# Altium PCB WL1800-E-D001-PrinterC Rev.2.0.PcbDoc (part 2 of 2)
Units mil, origin at the board's own origin, x right, y up, seen from the top; angles counter-clockwise.
Board outline 5519 x 3937.77 mil, 2 copper layers (Top Layer, Bottom Layer); 232 components, 142 nets, 822 pads, 384 vias.
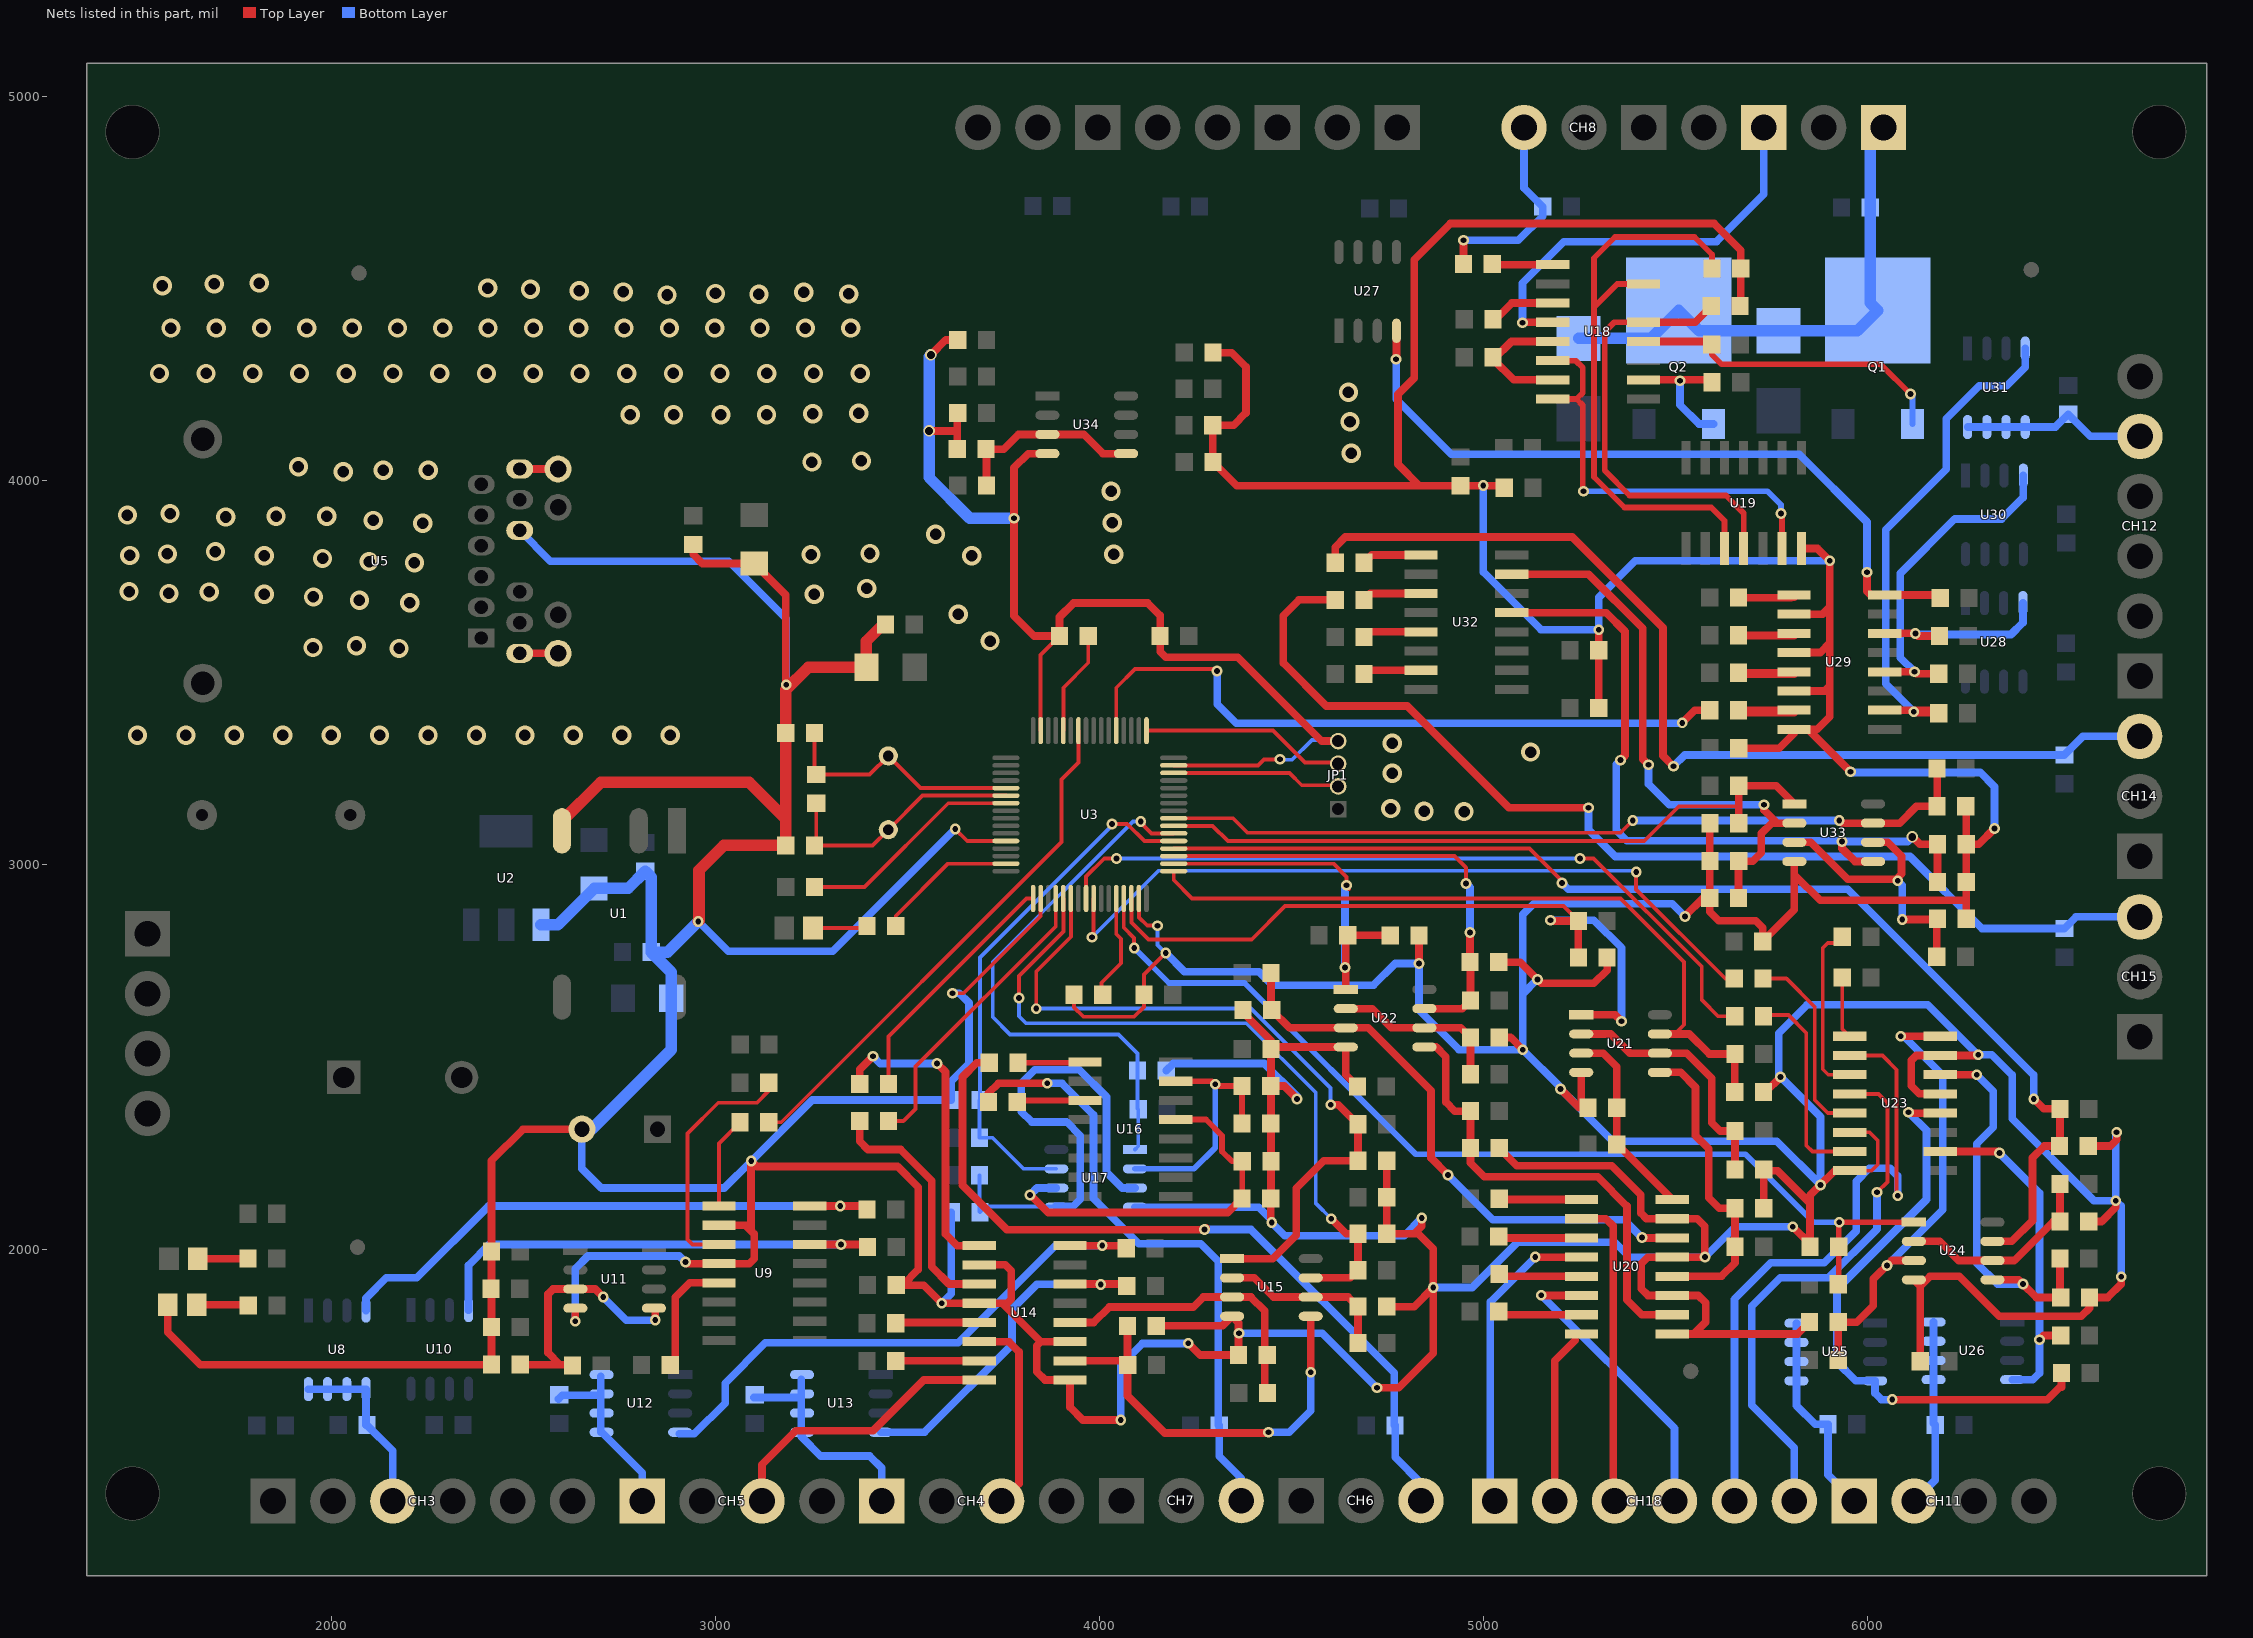
[diagram p2: the nets of this part, all layers, seen from the top]

## Via types
v1: diameter 28, hole 15, Top Layer to Bottom Layer, 192 vias
v2: diameter 50, hole 30, Top Layer to Bottom Layer, 179 vias
v3: diameter 30, hole 20, Top Layer to Bottom Layer, 10 vias
v4: diameter 133.86, hole 133.86, Top Layer to Bottom Layer, 2 vias
v5: diameter 28, hole 12, Top Layer to Bottom Layer, 1 vias

## Nets (pads, with @x,y where several pads share a name; then routed paths per layer and width w, separated by ;. In a path a pad name is that pad's centre, name@x,y a point inside that pad or via, vN(x,y) a via of type N, cw(c..) or ccw(c..) an arc to the next point about the centre after c; other vN are vias at no path point) (continued)
FIT_REACH: C79.2 R94.2 U32.13 U33.5 | length 1914.4
  Top Layer w20: U32.13@5073.11,3657 5319,3657 5368,3608 5368,3285 v1(5356,3273) ; v1(5933,3061) 5933,3043 5967,3009 U33.5@6013.72,3009 ; v3(6116,3073) 6117,3073 6136,3054 C79.2@6181.6,3054 R94.2@6181.6,2956
  Bottom Layer w20: v1(5356,3273) 5345,3262 5345,3091 5373,3063 5931,3063 v1(5933,3061) 6104,3061 v3(6116,3073)
FIT_REACH_IN: C80.2 CH15.3 R92.1 | length 2838.2
  Top Layer w20: R92.1@4613.6,3690.33 4519.33,3690.33 4478,3649 4478,3526 4590,3414 4801,3414 5066,3149 v1(5273,3149)
  Bottom Layer w20: v1(5273,3149) 5273,3092 5343,3022 6110,3022 6297.6,2834.4 C80.2@6512,2834.4 6542.41,2864.81 CH15.3@6708,2864.81
FIT_REACH_OUT: C75.1 R90.1 U3.40 U33.7 | length 2136.9
  Top Layer w10: U3.40@4193.01,3121.52 4347.48,3121.52 4385,3084 5356,3084 v1(5388,3116)
  Top Layer w20: v1(5926,3116) 5933,3109 U33.7@6013.72,3109 6083,3109 6127,3153 C75.1@6180.6,3153 R90.1@6180.6,3251
  Bottom Layer w20: v1(5388,3116) v1(5926,3116) v1@5927,3115
FLUID_BAG: C46.1 R36.1 U16.15 U17.2 | length 671.9
  Top Layer w15: U16.15@4198.11,2437 4293,2437 v1(4301,2429) 4305.5,2424.5 C46.1@4370.6,2424.5 R36.1@4370.6,2327
  Bottom Layer w15: U17.2@4092,2209 4246,2209 4301,2264 v1(4301,2429)
FLUID_BAG_IN: C47.2 CH6.3 R34.1 | length 2060.6
  Top Layer w20: R34.1@3712.6,2485 3680,2485 3643,2448 3643,2166 3759,2050 4272,2050 v1(4273,2051) v1@4277,2055
  Bottom Layer w20: v1(4273,2051) 4394,2051 4767.4,1677.6 C47.2@4767.4,1541 ; C47.2@4769.4,1541 4769.4,1458 4836.81,1390.59 CH6.3@4836.81,1345
FLUID_BAG_OUT: C43.1 R35.2 U3.38 U17.1 | length 1459.6
  Top Layer w10: v1(4107,3113) 4111,3113 4114,3116 4114,3103 4134.85,3082.15 U3.38@4193.01,3082.15
  Bottom Layer w10: U17.1@4092,2259 4100.6,2267.6 R35.2@4100.6,2364 4098.6,2366 C43.1@4098.6,2465 4098.6,2509.4 4049,2559 3767,2559 3722,2604 3722,2748 4087,3113 v1(4107,3113)
GND: C2.1 C3.2 C5.2 C6.1 C7.2 C8.2 C9.1 C10.1 C11.1 C12.1 C13.1 C20.1 C22.2 C33.2 C34.2 C35.1 C38.1 C39.1 C40.1 C41.1 C42.1 C43.2 C44.2 C45.1 C46.2 C48.1 C51.1 C53.2 C54.2 C55.2 C56.2 C57.1 C58.1 C59.1 C60.1 C61.1 C62.1 C63.2 C64.2 C65.1 C66.1 C67.1 C74.2 C75.2 C76.1 C77.2 C79.1 C81.2 C82.2 C83.1 C84.2 C86.1 JP1.4 LED1.2 R4.2 R7.1 R19.1 R21.2 R29.1 R36.2 R39.2 R41.2 R43.2 R45.2 R47.2 R57.1 R58.1 R70.1 R89.1 R93.1 R94.1 R97.1 R101.1 R102.1 U1.4 U2.1 U3.12 U3.18 U3.31 U3.47 U3.63 U5.10 U9.2 U9.4 U11.4 U14.2 U14.4 U14.9 U14.11 U15.4 U17.4 U19.7 U20.9 U20.11 U20.13 U20.15 U21.4 U22.4 U23.6 U23.8 U23.13 U23.15 U24.4 U29.2 U29.4 U29.6 U29.8 U33.4 U34.4 | length 38759.3
  Top Layer w10: v1(3617,2666) 3646,2666 3846.55,2866.55 U3.18@3846.55,2912.86 ; v1(3624,3094) 3655.54,3062.46 U3.12@3756,3062.46 ; U3.63@3846.55,3349.87 3846.55,3546.95 R4.2@3895.6,3596 ; R7.1@3933.6,2662 3933.6,2629.4 3958,2605 4090,2605 4115.6,2630.6 C10.1@4115.6,2662 4115.6,2714.6 v1(4172,2771) ; U3.31@4102.46,2912.86 4102.46,2863.54 4124,2842 v1(4151,2842) ; U3.47@4193.01,3259.31 4412.31,3259.31 4428,3275 v1(4470,3275) ; U23.8@5952.89,2204 6010,2204 6026,2220 6026,2283 6005,2304 U23.6@5952.89,2304
  Top Layer w20: LED1.2@1574.2,1855 1574.2,1783.8 1659,1699 R21.2@2416.6,1699 C34.2@2416.6,1797.33 C33.2@2416.6,1994 2416.6,2229.6 2499,2312 C3.2@2652.15,2312 ; v1(2635,1812) U11.4@2635,1846 ; v1(2922,1966) 2926,1962 U9.4@3008.89,1962 3088,1962 3101,1975 3101,2039 3092.5,2047.5 ; C20.1@2942,3834.6 2942,3809 2965.99,3785.01 C22.2@3101,3785.01 3183.06,3702.95 v1@3183.06,3456.06 ; U9.2@3008.89,2062 3078,2062 3092.5,2047.5 ; C35.1@3470.4,1906 C35.1@3487,1906 ; v3(3556,4130) 3629.6,4130 ; v3(3561,4328) 3600,4367 C81.2@3630.6,4367 ; R101.1@3629.6,4083 3629.6,4130 ; C84.2@3630.6,4177 3629.6,4176 3629.6,4130 ; U14.2@3686.89,1959 3754,1959 3770,1943 3770,1869 3760,1859 3747,1859 ; U34.4@3864,4071 3814,4071 3777,4034 v1(3777,3903) 3777,3649 3830,3596 R4.2@3895.6,3596 3895.6,3645.6 3932,3682 4125,3682 4157.6,3649.4 C11.1@4157.6,3596 4157.6,3555.4 4172,3541 4360,3541 4578.42,3322.58 JP1.4@4621,3322.58 ; U14.11@3923.11,1759 3847,1759 ; v1(4055,1555) 3956,1555 3923.11,1587.89 U14.9@3923.11,1659 3858,1659 3836,1681 3836,1748 3847,1759 ; C42.1@4147.4,1800 4320,1800 U15.4@4345,1825 4361.6,1808.4 C41.1@4361.6,1724 4262,1724 v1(4231,1755) ; C83.1@4295.4,4334 4344,4334 4381,4297 4381,4177 4349,4145 C82.2@4294.4,4145 4294.4,4050 C86.1@4295.4,4049 4356.8,3987.6 4832.4,3987.6 ; C61.1@4373.6,2622 4373.6,2615.4 4446.4,2542.6 C40.1@4446.4,2521 ; C46.2@4445.4,2424.5 C46.2@4446.4,2424.5 ; v1(4448,2069) 4445.4,2071.6 R41.2@4445.4,2132 4446.4,2133 C48.1@4446.4,2228.5 C46.2@4446.4,2424.5 ; v1(4514,2391) 4480.5,2424.5 C46.2@4446.4,2424.5 ; C58.1@4671.6,2423 4641,2453.6 U22.4@4641,2526 4451.4,2526 C40.1@4446.4,2521 ; v1(4722,1639) 4779,1639 4869,1729 v1(4869,1900) ; R29.1@4747.4,1850 4819,1850 v1(4869,1900) ; C38.1@4747.4,2230 C45.1@4747.4,2135 C39.1@4747.4,2040 4820,2040 ; v1(4831.4,2743.4) C56.2@4831.4,2816 ; v1(4839,2081) 4839,2059 4820,2040 ; C54.2@5039.4,2747 5095,2747 v1(5140,2702) 5150,2692 5287,2692 5321.4,2726.4 C55.2@5321.4,2759 ; C62.1@5040.4,2263 5086.4,2217 5333,2217 5409,2141 5409,2094 5424,2079 U20.15@5491.11,2079 5556,2079 5576,2059 v1(5576,1979) U20.13@5491.11,1979 5427,1979 5410,1962 5410,1897 5428,1879 U20.11@5491.11,1879 5559,1879 5578,1860 5578,1810 5547,1779 ; R58.1@5040.4,2551 5070,2551 v1(5102,2519) ; R47.2@5053.6,3982 5048,3987.6 C51.1@4940,3987.6 4832.4,3987.6 ; v1(5200,2417) 5249,2368 C59.1@5271.6,2368 5254,2385.6 U21.4@5254,2460 ; R102.1@5299.4,3409 R97.1@5299.4,3559 v1(5299.4,3612.6) ; U20.9@5491.11,1779 5547,1779 ; v1(5524,2866) 5572,2914 R89.1@5588.6,2914 ; C74.2@5589.6,3108.5 5588.6,3107.5 R89.1@5588.6,2914 ; C76.1@5664.4,3304 5770,3304 5808.89,3342.89 U29.8@5808.89,3347 ; R45.2@5667.4,4455 5669.4,4457 R43.2@5669.4,4553 5669.4,4600.6 5600,4670 4913,4670 4819,4576 4819,4268 4777,4226 4777,4043 4832.4,3987.6 ; C53.2@5728.4,2408.6 5733.6,2408.6 v1(5773,2448) ; C60.1@5729.4,2106.4 R57.1@5729.4,2206.8 5732.2,2204 5765,2204 5849.6,2119.4 ; v1(5805,2058) C63.2@5849.6,2013.4 ; U29.8@5807.89,3353 5868,3353 5901,3386 5901,3466 ; U29.6@5807.89,3453 5888,3453 5901,3466 ; U29.4@5807.89,3553 5876,3553 5901,3578 ; U29.2@5807.89,3653 5882,3653 5901,3672 ; U33.4@5809,3009 5809,2975 ; U19.7@5828.11,3823.89 5869.11,3823.89 v1(5901,3792) 5901,3672 ; C66.1@5848.6,1809.67 5817.93,1779 5547,1779 ; C63.2@5849.6,2006 C63.2@5849.6,2013.4 ; U29.8@5851,3347 v1(5955,3243) ; U23.8@5952.89,2204 5914,2204 v1(5877,2167) 5849.6,2139.6 5849.6,2119.4 ; U24.4@6120,1920 6136.6,1903.4 ; C65.1@6136.6,1708 6136.6,1903.4 ; U23.13@6189.11,2404 6134,2404 6113,2425 6113,2491 6126,2504 U23.15@6189.11,2504 6286,2504 v1(6288,2506) ; C75.2@6255.4,3153 6256.4,3152 C79.1@6256.4,3054 ; R93.1@6256.4,2860 6256.4,2908 ; v1(6330,3095) 6289,3054 C79.1@6256.4,3054 ; C64.2@6574.4,2268.2 6631.2,2268.2 6648,2285 v1(6648,2304) ; R70.1@6575.4,2071.6 6608.6,2071.6 6646,2109 v1(6646,2126) ; v1(6660,1928) 6660,1909 6625,1874 C67.1@6577.4,1874 6577.4,1846.4 6556,1825 6342,1825 6238,1929 6162.2,1929 6136.6,1903.4 ; 3092.5,2047.5 3092.5,2228.5 v1(3093,2229) 3107,2215 3474,2215 3528,2161 3528,1947 C35.1@3487,1906 ; C35.1@3487,1906 3542,1906 v1(3589,1859) U14.4@3686.89,1859 3747,1859 ; 3747,1859 3847,1759 ; C46.2@4446.4,2424.5 C40.1@4446.4,2521 ; 4820,2040 4830,2040 4869,2001 v1(4869,1900) ; R89.1@5588.6,2914 5588.6,2878.4 5612,2855 5708,2855 5726.4,2836.6 C57.1@5726.4,2801 5809,2883.6 5809,2975 ; 5809,2975 5876,2908 6256.4,2908 ; C63.2@5849.6,2013.4 5849.6,2119.4 ; 5901,3466 5901,3578 ; 5901,3578 5901,3672 ; 6256.4,2908 R94.1@6256.4,2956 C79.1@6256.4,3054
  Top Layer w30: U1.4@2600,3089 2600,3114 2701,3215 3088,3215 3183.06,3119.94 ; v1(2955,2853) 2957,2855 2957,2986 3022,3051 C13.1@3183.06,3051 3183.06,3119.94 ; C9.1@3440,3630 3393.01,3583.01 C8.2@3393.01,3515 3242,3515 3183.06,3456.06 C12.1@3183.06,3344 3183.06,3119.94
  Bottom Layer w10: v1(4151,2842) 4151,2792 v1(4172,2771) ; v1(4470,3275) 4471,3274 4501,3274 4552.58,3325.58 JP1.4@4618,3325.58
  Bottom Layer w20: U5.10@2490,3871 2570,3791 3034,3791 3184,3641 v1(3184,3469) ; v1(2635,1812) 2635,1949 2668,1982 2906,1982 v1(2922,1966) ; C3.2@2652.15,2312 2652.15,2209.85 2703,2159 3023,2159 v1(3093,2229) 3252,2388 C44.2@3613.6,2388 3613.6,2436.6 3660,2483 3660,2641 3635,2666 v1(3617,2666) ; v1(2955,2853) 3033,2775 3305,2775 v1(3624,3094) ; v1(3589,1859) 3613.6,1883.6 R39.2@3613.6,2096 ; v1(4055,1555) 4055,1698 4111,1754 4230,1754 v1(4231,1755) ; U17.4@4092,2109 4414,2109 4448,2075 v1(4448,2069) 4482,2035 4793,2035 v1(4839,2081) ; v1(4172,2771) 4221,2722 4415,2722 4450,2687 4713,2687 4769.4,2743.4 v1(4831.4,2743.4) 4831.4,2623.6 4936,2519 v1(5102,2519) ; C43.2@4173.4,2465 4191.4,2483 4429,2483 4514,2398 v1(4514,2391) ; v1(4363,1781) 4580,1781 v1(4722,1639) ; v1(4869,1900) 4970,1900 5088,2018 5341,2018 5380,1979 v1(5576,1979) 5655,2058 v1(5805,2058) ; v1(4999,3988) 4999,3763 5149.4,3612.6 v1(5299.4,3612.6) 5299.4,3696.4 5395,3792 v1(5901,3792) ; v1(5140,2702) 5102,2664 ; v1(5524,2866) 5491,2899 5130,2899 5102,2871 5102,2664 ; v1(5955,3243) 5957,3241 6293,3241 6330,3204 v1(6330,3095) ; v1(6648,2304) 6646,2302 v1(6646,2126) ; v1(6660,1928) 6660,2112 v1(6646,2126) ; v1(5102,2519) 5102,2664 ; v1(5102,2519) 5200,2421 v1(5200,2417) 5336,2281 5763,2281 v1(5877,2167) 5877,2344 v1(5773,2448) 5768,2453 5768,2562 5842,2636 6156,2636 6286,2506 v1(6288,2506) 6323,2506 6376,2453 6376,2339 6589,2126 v1(6646,2126)
  Bottom Layer w30: U2.1@2545.55,2843.95 2588.94,2843.95 C7.2@2684,2939.01 2772.41,2939.01 C6.1@2817,2983.6 2832.4,2968.2 C2.1@2832.4,2773 ; C3.2@2652.15,2312 2678,2312 2884.99,2518.99 C5.2@2884.99,2653 2884.99,2720.41 C2.1@2832.4,2773 ; v1(2955,2853) 2875,2773 C2.1@2832.4,2773 ; v3(3561,4328) 3556,4323 v3(3556,4130) 3556,4009 3662,3903 v1(3777,3903)
  other v2: 4949,3139 4845,3140 4758,3147 4762,3239 5122,3294 4762,3317 1495,3338 1621.09,3338 1747.18,3338 1873.27,3338 1999.36,3338 2125.45,3338 2251.55,3338 2377.64,3338 2503.73,3338 2629.82,3338 2755.91,3338 2882,3338 2176,3564 1952,3566 2065,3571 3715,3583 3632,3653 2204,3683 2073,3689 1953,3698 1825,3705 3257,3705 1577,3707 1682,3711 1473,3712 3394,3720 2216,3787 2098,3790 1977,3798 1825,3805 3667,3805 1475,3806 3249,3808 4037,3809 1573,3810 3402,3811 1698,3816 3573,3861 2238,3890 4033,3891 2109,3897 1725,3906 1856,3908 1988,3908 1469,3911 1580,3915 4030,3973 2031,4024 2135,4028 2252,4028 1914,4037 3251,4049 3380,4052 4655,4072 4652,4154 2778,4172 2891,4172 3014,4172 3133,4172 3253,4175 3373,4176 4648,4231 1552,4280 1673.67,4280 1795.33,4280 1917,4280 2038.67,4280 2160.33,4280 2282,4280 2403.67,4280 2525.33,4280 2647,4280 2768.67,4280 2890.33,4280 3012,4280 3133.67,4280 3255.33,4280 3377,4280 1582,4398 1700,4398 1818,4398 1936,4398 2054,4398 2172,4398 2290,4398 2408,4398 2526,4398 2644,4398 2762,4398 2880,4398 2998,4398 3116,4398 3234,4398 3352,4398 2874,4484 3113,4486 3347,4487 3000,4488 3230,4491 2760,4492 2645,4495 2518,4499 2407,4502 1560,4508 1695,4513 1812,4515
GREEN_LIGHT_IN: R25.2 U3.20 | length 782.9
  Top Layer w10: R25.2@3450.4,2333 3489,2333 3521,2365 3521,2475 3885.92,2839.92 U3.20@3885.92,2912.86
GREEN_LIGHT_OUT: C37.1 CH4.1 U13.5 U13.6 U13.7 U13.8 | length 612.9
  Bottom Layer w20: C37.1@3100,1613.4 U13.7@3220.87,1613.4 ; 3223.28,1511 3223.28,1611 U13.7@3220.87,1613.4 ; 3223.28,1661 3223.28,1615.8 U13.7@3220.87,1613.4 ; U13.5@3225.28,1523 3225.28,1509.72 3274,1461 3402,1461 3433,1430 CH4.1@3433,1344
K1: R45.1 U18.13 U19.4 | length 1166.4
  Top Layer w15: U18.13@5416.11,4413 5340,4413 5315,4388 5315,4027 5380,3962 5631,3962 5677,3916 U19.4@5677,3823.89
  Top Layer w20: U18.13@5416.11,4413 5550.6,4413 R45.1@5592.6,4455
KIN1: CH9.1 U18.4 | length 1080
  Top Layer w20: v1(5101,4412) 5102,4413 U18.4@5179.89,4413
  Bottom Layer w20: v1(5101,4412) 5101,4515 5209,4623 5606,4623 5729,4746 CH9.1@5729,4920
LED_TEST: R3.1 U3.15 | length 369.3
  Top Layer w10: R3.1@3469.4,2841 3469.4,2867.4 3605.41,3003.41 U3.15@3756,3003.41
M1: C52.2 CH10.1 D3.1 D4.2 Q1.2 Q2.2 | length 1351.6
  Bottom Layer w30: D4.2@5247,4370.9 5435.26,4370.9 Q2.2@5508,4443.64 5560.74,4390.9 D3.1@5768,4390.9 5973.26,4390.9 Q1.2@6026,4443.64 6006.4,4463.24 C52.2@6006.4,4712 6006.4,4885.4 CH10.1@6041,4920
NetC12_2: C12.2 R5.1 U3.5 Y1.1 | length 658.9
  Top Layer w10: C12.2@3257.87,3344 3257.87,3240 R5.1@3262.46,3235.4 3401.4,3235.4 Y1.1@3450,3284 3533.74,3200.26 U3.5@3756,3200.26
NetC13_2: C13.2 R5.2 U3.6 Y1.2 | length 663.3
  Top Layer w10: R5.2@3262.46,3160.6 3262.46,3055.6 C13.2@3257.87,3051 3409.13,3051 Y1.2@3450,3091.87 3538.7,3180.57 U3.6@3756,3180.57
NetLED1_1: LED1.1 R2.1 | length 135.4
  Top Layer w20: LED1.1@1649,1855 1781.6,1855 R2.1@1783.6,1853
NetLED2_1: LED2.1 R1.1 | length 130.6
  Top Layer w20: LED2.1@1652,1975 R1.1@1782.6,1975
NetLED4_2: LED4.2 R3.2 | length 142.9
  Top Layer w10: LED4.2@3253.8,2836 3389.6,2836 R3.2@3394.6,2841
NetQ1_1: Q1.1 R49.2 U18.12 | length 846.6
  Top Layer w15: R49.2@5593.6,4355 5593.6,4329.4 5619,4304 6033,4304 v1(6111,4226)
  Top Layer w20: U18.12@5416.11,4363 5585.6,4363 R49.2@5593.6,4355
  Bottom Layer w15: v1(6111,4226) 6116.55,4220.45 Q1.1@6116.55,4148.36
NetQ2_1: Q2.1 R50.2 U18.10 | length 352.1
  Top Layer w20: U18.10@5416.11,4263 5588.6,4263 R50.2@5594.6,4257
  Bottom Layer w20: v1(5511,4261) 5511,4198 5560.64,4148.36 Q2.1@5598.55,4148.36
NetR4_1: R4.1 U3.60 | length 273
  Top Layer w10: U3.60@3905.61,3349.87 3905.61,3461.61 3970.4,3526.4 R4.1@3970.4,3596
NetR6_2: R6.2 U3.7 | length 588.4
  Top Layer w10: R6.2@3257.87,2943 3388,2943 3605.89,3160.89 U3.7@3756,3160.89
NetR7_2: R7.2 U3.28 | length 256
  Top Layer w10: R7.2@4005.4,2683 4005.4,2693.4 4056,2744 4056,2808 4043.4,2820.6 U3.28@4043.4,2912.86
NetR13_1: R13.1 U8.4 U9.16 | length 1519.6
  Top Layer w20: U9.16@3245.11,2112 3385.6,2112 R13.1@3394.6,2103
  Bottom Layer w20: U8.4@2090,1840 2090,1872 2143,1925 2222,1925 2409,2112 v1(3325,2112)
NetR14_2: R14.2 U9.1 | length 240.7
  Top Layer w10: U9.1@3008.89,2112 3008.89,2275.29 R14.2@3063.6,2330
NetR15_2: R15.2 U9.14 U10.4 | length 1262.8
  Top Layer w20: U9.14@3245.11,2012 3388.6,2012 R15.2@3395.6,2005
  Bottom Layer w20: U10.4@2357,1841 2357,1958 2411,2012 v1(3327,2012)
NetR16_2: R16.2 U9.3 | length 642
  Top Layer w10: U9.3@3008.89,2012 2940,2012 2927,2025 2927,2301 3007,2381 3108,2381 3138.4,2411.4 R16.2@3138.4,2433
NetR17_2: R17.2 U9.5 | length 308.8
  Top Layer w20: R17.2@2887.4,1698 2895,1705.6 2895,1874 2933,1912 U9.5@3008.89,1912
NetR20_2: R20.2 R21.1 U11.3 U11.5 | length 681.3
  Top Layer w20: R21.1@2491.4,1699 2595,1699 ; R20.2@2625.6,1699 2595,1699 ; v1(2708,1875) 2687,1896 U11.3@2635,1896 2577,1896 2564,1883 2564,1730 2595,1699 ; U11.5@2839.72,1846 2843,1842.72 v1(2843,1815)
  Bottom Layer w20: v1(2708,1875) 2768,1815 v1(2843,1815)
NetR22_1: R22.1 U12.4 U14.16 | length 1483.8
  Top Layer w20: U14.16@3923.11,2009 v1(4007,2009) 4062.6,2009 R22.1@4069.6,2002
  Bottom Layer w20: U12.4@2906,1519 2945,1519 3025,1599 3025,1651 3130,1756 3632,1756 3885,2009 v1(4007,2009)
NetR23_1: R23.1 U13.4 U14.14 | length 935.9
  Top Layer w20: U14.14@3923.11,1909 4065.6,1909 R23.1@4070.6,1904
  Bottom Layer w20: U13.4@3430,1523 3544,1523 3772,1751 3772,1843 3837,1908 v1(4003,1908)
NetR24_1: R24.1 U14.1 | length 814.5
  Top Layer w20: R24.1@3375.6,2430 3375.6,2467.6 v1(3410,2502) ; v1(3577,2483) 3599,2461 3599,2039 3629,2009 U14.1@3686.89,2009
  Bottom Layer w20: v1(3410,2502) 3429,2483 v1(3577,2483)
NetR25_1: R25.1 U14.3 | length 648.9
  Top Layer w20: R25.1@3375.6,2333 3375.6,2280.4 3397,2259 3482,2259 3563,2178 3563,1954 3608,1909 U14.3@3686.89,1909
NetR26_2: R26.2 U14.5 | length 218.3
  Top Layer w20: R26.2@3469.4,1807 3471.4,1809 U14.5@3686.89,1809
NetR29_2: R29.2 R30.2 U15.2 U15.6 | length 453.7
  Top Layer w20: U15.2@4345,1925 4403,1925 4453,1875 U15.6@4549.72,1875 4647.6,1875 R29.2@4672.6,1850 R30.2@4672.6,1755
NetR32_2: R32.2 U14.7 | length 217.5
  Top Layer w20: R32.2@3469.4,1709 U14.7@3686.89,1709
NetR34_2: R34.2 U16.1 | length 175.3
  Top Layer w15: R34.2@3787.4,2485 3959.89,2485 U16.1@3961.89,2487
NetR38_2: R38.2 R39.1 U17.3 U17.5 | length 1342.7
  Bottom Layer w10: R38.2@3687.4,2192.33 3687.4,2097 R39.1@3688.4,2096 3703.4,2111 U17.5@3885.28,2111
  Bottom Layer w20: 3793,2429 3831,2467 ; 3796,2429 3796,2358 3823,2331 3914,2331 3950,2295 3950,2130 3931,2111 U17.5@3885.28,2111 ; 3834,2467 3947,2467 4018,2396 4018,2200 4059,2159 U17.3@4092,2159
NetR40_2: R40.2 U16.3 | length 178.1
  Top Layer w15: R40.2@3785.4,2383 3789.4,2387 U16.3@3961.89,2387
NetR42_2: R42.2 U18.1 | length 158.3
  Top Layer w20: R42.2@5022.4,4565 5024.4,4563 U18.1@5179.89,4563
NetR44_2: R44.2 U18.3 | length 174.4
  Top Layer w20: R44.2@5025.4,4415 5073.4,4463 U18.3@5179.89,4463
NetR48_2: R48.2 U18.5 U18.7 | length 350.4
  Top Layer w20: U18.7@5179.89,4263 5078.4,4263 5025.4,4316 5072.4,4363 U18.5@5179.89,4363
NetR51_2: R51.2 U20.1 | length 215.3
  Top Layer w20: R51.2@5040.4,2131 5042.4,2129 U20.1@5254.89,2129
NetR53_2: R53.2 U20.3 | length 217.1
  Top Layer w20: R53.2@5039.4,2033 5043.4,2029 U20.3@5254.89,2029
NetR57_2: R57.2 R59.2 U21.2 U21.6 | length 673.7
  Top Layer w20: U21.2@5254,2560 5331,2560 5381,2510 U21.6@5458.72,2510 5529,2510 5594,2445 5594,2329 5615.8,2307.2 R59.2@5654.6,2307.2 R57.2@5654.6,2206.8
NetR58_2: R58.2 R61.2 U22.2 U22.6 | length 451.7
  Top Layer w20: U22.2@4641,2626 4710,2626 4760,2576 U22.6@4845.72,2576 4940.6,2576 R58.2@4965.6,2551 R61.2@4965.6,2455
NetR63_2: R63.2 U20.5 | length 217
  Top Layer w20: R63.2@5040.4,1935 5046.4,1929 U20.5@5254.89,1929
NetR65_2: R65.2 U20.7 | length 218.8
  Top Layer w20: R65.2@5039.4,1837 5047.4,1829 U20.7@5254.89,1829
NetR67_2: R67.2 U23.1 | length 161
  Top Layer w10: R67.2@5933.6,2707 5933.6,2573.29 U23.1@5952.89,2554
NetR70_2: R70.2 R71.2 U24.2 U24.6 | length 541.2
  Top Layer w20: U24.2@6120,2020 6187,2020 6237,1970 U24.6@6324.72,1970 6381,1970 6482.6,2071.6 R70.2@6500.6,2071.6 R71.2@6500.6,2169.4
NetR73_2: R73.2 U23.3 | length 459.3
  Top Layer w10: R73.2@5938.6,2813 5922.6,2797 5896,2797 5883,2784 5883,2468 5897,2454 U23.3@5952.89,2454
NetR75_2: R75.2 U23.12 U25.4 | length 1532.8
  Top Layer w20: v1(6064,1608) 6461,1608 ; v1(6106,2356) 6108,2354 U23.12@6189.11,2354 ; 6467,1608 6499.6,1640.6 ; 6504.6,1640.6 R75.2@6504.6,1674.6
  Top Layer w30: R75.2@6504.6,1674.6 R75.2@6504.6,1677
  Bottom Layer w20: v1(6064,1608) 6036,1608 6019,1625 U25.4@6019,1657 5969,1657 5920,1706 5920,1896 6153,2129 6153,2309 v1(6106,2356)
NetR76_2: R76.2 U23.10 U26.4 | length 909.8
  Top Layer w20: U23.10@6189.11,2254 6339,2254 v1(6343,2250) ; v1(6447,1764) 6458,1775 R76.2@6502.6,1775
  Bottom Layer w20: v1(6343,2250) 6447,2146 v1(6447,1764) 6447,1677 6430,1660 U26.4@6376,1660
NetR77_2: R77.2 U23.5 | length 512.2
  Top Layer w10: R77.2@5727.4,2704 5788,2704 5862,2630 5862,2388 5896,2354 U23.5@5952.89,2354
NetR78_2: R78.2 U23.7 | length 542.2
  Top Layer w10: R78.2@5729.4,2609 5794,2609 5840,2563 5840,2270 5856,2254 U23.7@5952.89,2254
NetR79_2: R79.2 U27.4 U29.16 | length 1915.2
  Top Layer w20: v1(4772,4317) 4773,4318 U27.4@4773,4391 ; v1(5998,3762) 5998,3713 6008,3703 U29.16@6044.11,3703 6180.6,3703 R79.2@6186.6,3697
  Bottom Layer w20: v1@4772,4320 v1(4772,4317) 4772,4213 4916,4069 5822,4069 5998,3893 v1(5998,3762)
NetR80_2: R80.2 U28.4 U29.14 | length 490.5
  Top Layer w20: U29.14@6044.11,3603 v1(6124,3603) 6131,3596 R80.2@6186.6,3596
  Bottom Layer w20: v1(6124,3603) 6127,3600 6373,3600 6404,3631 U28.4@6404,3682
NetR81_2: R81.2 U29.1 | length 154.4
  Top Layer w20: R81.2@5663.4,3696 5800.89,3696 U29.1@5801.89,3697 ; U29.1@5807.89,3703 U29.1@5801.89,3697 ; U29.1@5808.89,3697 U29.1@5801.89,3697
NetR82_2: R82.2 U29.3 | length 292.5
  Top Layer w20: U29.3@5807.89,3603 5803.14,3598.25 R82.2@5663.4,3598.25 5664.65,3597 U29.3@5808.89,3597
NetR83_2: R83.2 U29.12 U30.4 | length 872.9
  Top Layer w20: U29.12@6044.11,3503 v1(6122,3503) 6127,3498 R83.2@6184.6,3498
  Bottom Layer w20: v1(6122,3503) 6085,3540 6085,3759 6227,3901 6349,3901 6405,3957 U30.4@6405,4014
NetR84_2: R84.2 U29.10 U31.4 | length 1373.2
  Top Layer w20: U29.10@6044.11,3403 6176.6,3403 6182.6,3397 6122,3397 v1(6120,3399)
  Bottom Layer w20: v1(6120,3399) 6047,3472 6047,3873 6204,4030 6204,4162 6290,4248 6362,4248 6410,4296 U31.4@6410,4345
NetR85_2: R85.2 U29.5 | length 292.5
  Top Layer w20: U29.5@5807.89,3503 5805.39,3500.5 R85.2@5663.4,3500.5 5666.9,3497 U29.5@5808.89,3497
NetR86_2: R86.2 U29.7 | length 292.5
  Top Layer w20: U29.7@5807.89,3403 5807.64,3402.75 R86.2@5663.4,3402.75 5669.15,3397 U29.7@5808.89,3397
NetR87_2: R87.2 U32.1 | length 156.8
  Top Layer w20: R87.2@4688.4,3787 4708.4,3807 U32.1@4836.89,3807
NetR91_1: R91.1 R93.2 U33.3 U33.6 | length 753.7
  Top Layer w20: U33.3@5809,3059 5852,3059 5948,2963 6074,2963 6088,2977 6088,3023 6052,3059 U33.6@6013.72,3059 ; v1@6089,2859 v1(6090,2858) 6179.6,2858 R91.1@6179.6,2761
  Bottom Layer w20: v1(6078,2959) 6090,2947 v1(6090,2858)
NetR92_2: R92.2 U32.3 | length 155.4
  Top Layer w20: R92.2@4688.4,3690.33 4705.07,3707 U32.3@4836.89,3707
NetR95_2: R95.2 U32.5 | length 154
  Top Layer w20: R95.2@4688.4,3593.67 4701.73,3607 U32.5@4836.89,3607
NetR99_1: R99.1 R101.2 U34.3 U34.5 | length 494.6
  Top Layer w20: R99.1@3704.4,3988 3705.4,3989 3705.4,4082 3750,4082 3789,4121 U34.3@3864,4121 3959,4121 4009,4071 U34.5@4068.72,4071
NetR100_2: R100.2 U32.7 | length 152.6
  Top Layer w20: R100.2@4688.4,3497 4698.4,3507 U32.7@4836.89,3507
NetU5_7: U5.7 U5.13 | length 100
  Top Layer w20: U5.7@2490,3551 U5.13@2590,3551
NetU5_12: U5.12 U5.16 | length 100
  Top Layer w20: U5.12@2490,4031 U5.16@2590,4031
NetU18_6: U18.6 U18.8 U19.6 | length 1127.6
  Top Layer w15: U18.8@5179.89,4213 5242,4213 ; U18.6@5179.89,4313 5240,4313 5258,4295 5258,4229 5242,4213 ; v1(5260,3973) 5258,3975 5258,4197 5242,4213 ; v1(5774,3915) 5777,3912 U19.6@5777,3823.89
  Bottom Layer w15: v1(5260,3973) 5739,3973 5774,3938 v1(5774,3915)
PRINTER_COLOR_END: C60.2 R64.2 U20.12 U21.5 | length 810.6
  Top Layer w20: U21.5@5458.72,2460 5513,2460 5551.5,2421.5 5551.5,2295.5 5586,2261 5586,2134 5613.6,2106.4 C60.2@5654.6,2106.4 R64.2@5654.6,2006 5654.6,1964.6 5619,1929 U20.12@5491.11,1929
PRINTER_COLOR_END_IN: CH18.4 U20.6 | length 785
  Top Layer w20: v1(5150,1880) 5151,1879 U20.6@5254.89,1879
  Bottom Layer w20: v1(5150,1880) 5497,1533 CH18.4@5497,1344
PRINTER_COLOR_END_OUT: C53.1 R60.2 U3.33 U21.7 | length 1954.5
  Top Layer w10: U3.33@4193.01,2983.72 4193.01,2960.99 4241,2913 5356,2913 5522,2747 5522,2584 5498,2560
  Top Layer w20: U21.7@5458.72,2560 5498,2560 5535,2560 5587,2508 R60.2@5654.6,2508 5653.6,2507 C53.1@5653.6,2408.6
PRINTER_COLOR_LESS: C66.2 R68.2 U23.16 U24.3 | length 1212.7
  Top Layer w20: R68.2@5923.4,1711 C66.2@5923.4,1809.67 5971.67,1809.67 6014,1852 6014,1922 6062,1970 U24.3@6120,1970 ; v1(6086,2554) U23.16@6189.11,2554
  Bottom Layer w20: v1(6050,1957) 6195,2102 6195,2453 6094,2554 v1(6086,2554)
PRINTER_COLOR_LESS_IN: CH18.5 U23.2 | length 1692.8
  Top Layer w10: U23.2@5952.89,2504 6038,2504 6075,2467 6075,2142 v1(6078,2139)
  Bottom Layer w20: CH18.5@5652.91,1344 5652.91,1868.91 5748,1964 5887,1964 5970,2047 5970,2176 6004,2210 6058,2210 6078,2190 v1(6078,2139)
PRINTER_COLOR_LESS_OUT: C63.1 R69.2 U3.29 U24.1 | length 2645.5
  Top Layer w10: U3.29@4063.09,2912.86 4063.09,2836.91 4090,2810 v1(4090,2784)
  Top Layer w15: R69.2@5923.4,1908.33 5924.4,1909.33 C63.1@5924.4,2006 ; C63.1@5936.4,1994 C63.1@5924.4,2006 ; U24.1@6120,2070 v1(5926,2070) 5924.4,2068.4 C63.1@5924.4,2006
  Bottom Layer w15: v1(4090,2784) 4181,2693 4377,2693 4823,2247 5682,2247 5859,2070 v1(5926,2070)
PRINTER_END: C62.2 R66.2 U20.10 U22.5 | length 1225
  Top Layer w20: U22.5@4845.72,2526 4876,2526 4901,2501 4901,2383 4925,2359 R66.2@4965.6,2359 C62.2@4965.6,2263 4965.6,2224.4 5002,2188 5297,2188 5373,2112 5373,1868 5412,1829 U20.10@5491.11,1829
PRINTER_END_IN: CH18.2 U20.8 | length 440.7
  Top Layer w20: CH18.2@5184.91,1344 5184.91,1709.02 5238.44,1762.56
PRINTER_END_OUT: C54.1 R62.2 U3.35 U22.7 | length 1253.7
  Top Layer w10: U3.35@4193.01,3023.09 4923.91,3023.09 4954,2993 v1(4954,2952)
  Top Layer w20: U22.7@4845.72,2626 4944.6,2626 R62.2@4965.6,2647 4965.6,2746 C54.1@4964.6,2747 v1(4964.6,2824.4) v1@4964,2825
  Bottom Layer w20: v1(4954,2952) 4964.6,2941.4 v1(4964.6,2824.4)
PRINTER_ERR: C61.2 R54.2 U20.14 U22.3 | length 1488.7
  Top Layer w20: R54.2@4446.4,2719 4446.4,2624 C61.2@4448.4,2622 4494.4,2576 U22.3@4641,2576 4699,2576 4863,2412 4863,2237 v1(4907,2193) ; v1(5412,2030) 5413,2029 U20.14@5491.11,2029
  Bottom Layer w20: v1(4907,2193) 5024,2076 5366,2076 v1(5412,2030)
PRINTER_ERR_IN: CH18.1 U20.4 | length 809.3
  Top Layer w20: v1(5134,1979) U20.4@5254.89,1979
  Bottom Layer w20: CH18.1@5029,1344 5017,1356 5017,1862 v1(5134,1979)
PRINTER_ERR_OUT: C56.1 R56.2 U3.34 U22.1 | length 967.1
  Top Layer w10: U3.34@4193.01,3003.41 4608.59,3003.41 4643,2969 v1(4643,2947) ; v1@4641,2945 v1@4649,2937
  Top Layer w20: U22.1@4641,2676 4641,2811.6 R56.2@4646.4,2817 4755.6,2817 C56.1@4756.6,2816
  Bottom Layer w20: v1(4639,2733) 4639,2943 v1(4643,2947)
PRINTER_INLINE: C59.2 R52.2 U20.16 U21.3 | length 514.1
  Top Layer w20: U21.3@5254,2510 5311,2510 5346.4,2474.6 C59.2@5346.4,2368 R52.2@5346.4,2272 5349,2272 5491.11,2129.89 U20.16@5491.11,2129
PRINTER_INLINE_IN: CH18.3 U20.2 | length 813.5
  Top Layer w20: U20.2@5254.89,2079 5318,2079 5337,2060 5337,1347.81 CH18.3@5340.81,1344 CH18.3@5345,1348.19
PRINTER_INLINE_OUT: C55.1 R55.2 U3.30 U21.1 | length 1983.3
  Top Layer w10: U3.30@4082.77,2912.86 4082.77,2850.23 4127,2806 4396,2806 4483,2893 5207.6,2893 R55.2@5246.6,2854
  Top Layer w20: v1(5174,2856) 5176,2854 R55.2@5246.6,2854 C55.1@5246.6,2759 ; U21.1@5254,2610 5342,2610 v1(5359,2593)
  Bottom Layer w20: v1(5174,2856) 5287,2856 5359,2784 v1(5359,2593)
PRINTER_RESTART_IN: R78.1 U3.24 | length 1986.6
  Top Layer w10: U3.24@3964.66,2912.86 3964.66,2969.66 4012,3017 v1(4044,3017) ; v1(5251,3017) 5286,3017 5568,2735 5568,2648 5610,2606 R78.1@5653.6,2606
  Bottom Layer w10: v1(4044,3017) v1(5251,3017)
PRINTER_RESTART_OUT: C69.2 CH11.2 U26.5 U26.6 U26.7 U26.8 | length 490.4
  Bottom Layer w20: CH11.2@6120.91,1344 6175.6,1398.69 C69.2@6175.6,1542 6171.28,1546.32 U26.5@6171.28,1660 U26.6@6171.28,1710 U26.7@6171.28,1760 U26.8@6171.28,1810
PRINTER_START_IN: R77.1 U3.25 | length 1990.3
  Top Layer w10: v1(3980,2812) 3984.35,2816.35 U3.25@3984.35,2912.86 ; v1(5397,2982) 5397,2936 5629,2704 R77.1@5652.6,2704
  Bottom Layer w10: v1(3980,2812) 4153,2985 5394,2985 v1(5397,2982)
PRINTER_START_OUT: C68.2 CH11.1 U25.5 U25.6 U25.7 U25.8 | length 545.1
  Bottom Layer w20: U25.8@5814.28,1807 U25.7@5814.28,1757 U25.6@5814.28,1707 U25.5@5814.28,1657 5814.28,1592.72 5863,1544 C68.2@5896.6,1544 5896.6,1412.4 CH11.1@5965,1344
PRINTER_TAG_END: C67.2 R74.2 U23.14 U24.5 | length 1062.6
  Top Layer w20: U23.14@6189.11,2454 v1(6284,2454) ; U24.5@6324.72,1920 6393,1920 v1(6404,1909) 6439,1874 C67.2@6502.6,1874 6500.6,1876 R74.2@6500.6,1975
  Bottom Layer w20: v1(6284,2454) 6327,2411 6327,2317 6284,2274 6284,1963 6338,1909 v1(6404,1909)
PRINTER_TAG_END_IN: CH18.6 U23.4 | length 1410
  Top Layer w10: U23.4@5952.89,2404 6028,2404 6051,2381 6051,2175 v1(6024,2148)
  Bottom Layer w20: CH18.6@5808.81,1344 5808.81,1482.19 5698,1593 5698,1851 5772,1925 5897,1925 6024,2052 v1(6024,2148)
PRINTER_TAG_END_OUT: C64.1 R72.2 U3.36 U24.7 | length 3098.5
  Top Layer w10: U3.36@4193.01,3042.78 5119.22,3042.78 5204,2958 v1(5204,2953)
  Top Layer w20: U24.7@6324.72,2020 6375,2020 6429,2074 6429,2238 6459.2,2268.2 C64.1@6499.6,2268.2 6500.6,2269.2 R72.2@6500.6,2365 6458,2365 v1(6432,2391)
  Bottom Layer w20: v1(5204,2953) 5220,2937 5948,2937 6432,2453 v1(6432,2391)
RED_LIGHT_IN: R24.2 U3.17 | length 648.8
  Top Layer w10: R24.2@3450.4,2430 3450.4,2553.4 3809.86,2912.86 U3.17@3826.87,2912.86
RED_LIGHT_OUT: C36.1 CH5.1 U12.5 U12.6 U12.7 U12.8 | length 483
  Bottom Layer w20: C36.1@2591,1609.4 2600.6,1619 U12.7@2701.28,1619 ; U12.5@2701.28,1523 U12.7@2701.28,1619 ; U12.8@2701.28,1669 U12.7@2701.28,1619 ; U12.5@2703.28,1523 2809,1417.28 CH5.1@2809,1344
S11: R43.1 U18.15 U19.3 | length 1569.4
  Top Layer w15: U18.15@5416.11,4513 5348,4513 5287,4452 ; R43.1@5594.6,4553 5594.6,4589.4 5549,4635 5342,4635 5287,4580 5287,4452 ; U19.3@5627,3823.89 5627,3896 5592.5,3930.5 5366.5,3930.5 5287,4010 5287,4452
SCANNER: C48.2 R41.1 U16.13 U17.6 | length 1001.1
  Top Layer w15: U16.13@4198.11,2337 4277,2337 4319,2295 4319,2254 4344.5,2228.5 C48.2@4371.6,2228.5 4371.6,2133 R41.1@4370.6,2132
  Top Layer w20: v1(3819,2141) 3820,2141 3866,2095 4333.6,2095 R41.1@4370.6,2132
  Bottom Layer w20: v1(3819,2141) 3837,2159 U17.6@3887.28,2159
SCANNER_IN: C49.2 CH7.3 R40.1 | length 1598.6
  Top Layer w20: R40.1@3710.6,2383 3710.6,2405.6 3737,2432 v1(3864,2432)
  Bottom Layer w20: v1(3864,2432) 3902,2432 3984,2350 3984,2132 4102,2014 4263,2014 4309,1968 C49.2@4309,1541 ; C49.2@4311.4,1541 4311.4,1461 4368.81,1403.59 CH7.3@4368.81,1345
SCANNER_OUT: C44.1 R37.2 U3.37 U17.7 | length 1378.5
  Top Layer w10: v1(4032,3107) 4072,3107 4116.54,3062.46 U3.37@4193.01,3062.46
  Bottom Layer w10: C44.1@3687.4,2387 R37.2@3687.4,2289.67 3721.33,2289.67 3802,2209 U17.7@3887.28,2209 ; C44.1@3688.4,2388 3688.4,2759.4 4032,3103 v1(4032,3107) v1@4027,3112
SIN11: C50.2 CH8.3 R42.1 | length 544.9
  Top Layer w20: v1@4947,4627 v1(4947.6,4626.4) R42.1@4947.6,4565
  Bottom Layer w20: v1(4947.6,4626.4) 5090.4,4626.4 5153.6,4689.6 C50.2@5153.6,4714 5105.19,4762.41 CH8.3@5105.19,4920
SPEED11_IN: R14.1 U3.58 | length 1373.1
  Top Layer w10: R14.1@3138.4,2330 3171,2330 3901,3060 3901,3223 3944.98,3266.98 U3.58@3944.98,3349.87
SPEED11_OUT: C31.1 CH3.3 U8.5 U8.6 U8.7 U8.8 | length 469.2
  Bottom Layer w20: U8.8@1940,1635.28 U8.7@1990,1635.28 U8.6@2040,1635.28 U8.5@2090,1635.28 C31.1@2090,1542 ; C31.1@2092.4,1542 2159.81,1474.59 CH3.3@2159.81,1344
START_KEY: C41.2 R27.2 U14.12 U15.3 | length 766.2
  Top Layer w20: U14.12@3923.11,1809 3985,1809 4025,1849 4244,1849 4270,1875 U15.3@4345,1875 4394,1875 4430,1839 4430,1632.4 R27.2@4437.4,1625
START_KEY_IN: CH4.3 U14.6 | length 521.6
  Top Layer w20: U14.6@3686.89,1759 3764,1759 3790,1733 3790,1389.19 CH4.3@3744.81,1344
START_KEY_OUT: C38.2 R28.2 U3.22 U15.1 | length 1916.4
  Top Layer w10: v1(3835,2626) 3835,2723 3925.29,2813.29 U3.22@3925.29,2912.86
  Top Layer w20: U15.1@4345,1975 4451,1975 4512,2036 4512,2158 4584,2230 C38.2@4672.6,2230 R28.2@4672.6,2325 4621.6,2376 v1(4602,2376)
  Bottom Layer w10: v1(3835,2626) 4394,2626 4601,2419 v1@4601,2370
STOP_KEY: C42.2 R33.2 U14.10 U15.5 | length 1123.1
  Top Layer w20: U14.10@3923.11,1709 4062.6,1709 R33.2@4072.6,1699 ; C42.2@4072.6,1800 R33.2@4072.6,1699 ; v1(4440,1523) 4438,1521 4170,1521 4072.6,1618.4 R33.2@4072.6,1699 ; U15.5@4549.72,1825 4549.72,1779.28 4550,1779 v1(4550,1679)
  Bottom Layer w20: v1(4440,1523) 4494,1523 4550,1579 v1(4550,1679)
STOP_KEY_IN: CH5.3 U14.8 | length 752.1
  Top Layer w20: CH5.3@3120.81,1344 3120.81,1438.81 3209,1527 3410,1527 3542,1659 U14.8@3686.89,1659
STOP_KEY_OUT: C39.2 R31.2 U3.21 U15.7 | length 1866.7
  Top Layer w10: v1(3790,2654) 3790,2711 3905.61,2826.61 U3.21@3905.61,2912.86
  Top Layer w20: U15.7@4549.72,1925 4652.6,1925 R31.2@4672.6,1945 C39.2@4672.6,2040 4642,2040 v1(4603,2079)
  Bottom Layer w10: v1(3790,2654) 3790,2606 3808,2588 4382,2588 4563,2407 4563,2119 v1(4603,2079)
TCK/SWCLK1: JP1.3 U3.49 | length 534.6
  Top Layer w10: U3.49@4122.14,3349.87 4451.13,3349.87 4534.47,3266.53 4618,3266.53 JP1.3@4621,3263.53
TMS/SWDIO1: JP1.2 U3.46 | length 442.6
  Top Layer w10: U3.46@4193.01,3239.63 4494.37,3239.63 4526.53,3207.47 4618,3207.47 JP1.2@4621,3204.47
UPPER_REACH: C77.1 R89.2 U32.15 U33.2 | length 1507.7
  Top Layer w20: U32.15@5073.11,3757 5273,3757 5414,3616 5414,3276 v1(5429,3261) ; R89.2@5663.4,2914 5663.4,3009.75 5700.75,3009.75 5723,3032 5723,3082 5750,3109 5764,3109 ; v1(5730,3157) 5730,3143 5764,3109 ; U33.2@5809,3109 5764,3109
  Bottom Layer w20: v1(5429,3261) 5429,3211 5483,3157 v1(5730,3157)
UPPER_REACH_IN: C78.2 CH14.3 R87.1 | length 2621.1
  Top Layer w20: R87.1@4613.6,3787 4613.6,3827.6 4640,3854 5231,3854 5467,3618 5467,3284 v1(5494,3257)
  Bottom Layer w20: v1(5494,3257) 5523.4,3286.4 C78.2@6512,3286.4 6560.41,3334.81 CH14.3@6708,3334.81
UPPER_REACH_OUT: C74.1 R88.1 U3.39 U33.1 | length 1787.5
  Top Layer w10: U3.39@4193.01,3101.83 4294.17,3101.83 4334,3062 5418,3062 5509,3153 5664.4,3153
  Top Layer w20: C74.1@5664.4,3108.5 5664.4,3153 R88.1@5664.4,3206.25 5761.75,3206.25 U33.1@5809,3159
VACUUM_IN: R86.1 U3.53 | length 1799.6
  Top Layer w10: U3.53@4043.4,3349.87 4043.4,3461.4 4092,3510 4301,3510 v1(4306,3505)
  Top Layer w20: v1(5517,3370) 5549.75,3402.75 R86.1@5588.6,3402.75
  Bottom Layer w20: v1(4306,3505) 4306,3419 4356,3369 5516,3369 v1(5517,3370)
VACUUM_OUT: C73.2 CH12.5 U31.5 U31.6 U31.7 U31.8 | length 486.7
  Bottom Layer w20: U31.8@6260,4140.28 U31.7@6310,4140.28 U31.6@6360,4140.28 U31.5@6410,4140.28 6488.68,4140.28 C73.2@6522,4173.6 6579.69,4115.91 CH12.5@6709,4115.91
pads on no net: Pad1.1 Pad2.1 Pad3.1 Pad4.1 U1.8 U3.1 U3.2 U3.3 U3.4 U3.8 U3.9 U3.10 U3.11 U3.14 U3.16 U3.26 U3.27 U3.50 U3.54 U3.55 U3.56 U3.62 U5.1 U5.2 U5.3 U5.5 U5.6 U5.17 U9.7 U9.8 U9.9 U9.10 U11.6 U11.7 U16.5 U16.6 U16.7 U16.8 U16.9 U16.10 U16.11 U16.12 U19.1 U19.2 U19.8 U19.9 U19.10 U19.11 U19.12 U19.13
copper on no net: | length 1508
  Bottom Layer w10: 2128,2005 ccw(c2068,2005) 2128,2005 ; 2133,4540 ccw(c2073,4540) 2133,4540 ; 5599,1682 ccw(c5539,1682) 5599,1682 ; 6486,4550 ccw(c6426,4550) 6486,4550
  other v4: 1790,3541 1790,4041

## Polygon pours and split planes (outlines as drawn)
24V0 on Top Layer "Top Layer-No Net" (hatched 90Degree grid 20 track 12, remove dead copper, pour order 6): 1378,5080 1390,5092 6877,5092 6877,1128 6886,1119 6847,1158 1361,1158 1361,3188 1374,3201 2421,3201 2421,2052 2370,2001 2425,1946 6229,1946 6229,4511 6161,4579 6089,4651 1382,4651
GND on Top Layer "Top Layer-No Net" (hatched 90Degree grid 20 track 12, remove dead copper, pour order 12): 1348,4672 6089,4672 6127,4634 6211.4,4549.6 6211.4,1889 2402,1889 2362,1929 2400,1967 2400,3193 1425,3193 1374,3244 1353,3265 1353,3294
24V0 on Bottom Layer "Top Layer-No Net" (hatched 90Degree grid 20 track 12, remove dead copper, pour order 8): 1361,5092 6895,5092 6903,5084 6882,5063 6882,1141 1371,1141 1363,1149 1370,1156 1370,3231 2387,3231 2421,3197 2379,3155 2379,1942 6224,1942 6258,1908 6220,1946 6220,4499 6220,4541 6097,4664 6089,4672 1344,4672 1344,5063 1382,5101
GND on Bottom Layer "Top Layer-No Net" (hatched 90Degree grid 20 track 12, remove dead copper, pour order 10): 1370,4656 1374,4660 6059,4660 6097,4660 6250,4507 6241,4498 6241,1916 2392,1916 2366,1942 2400,1976 2400,3176 1429,3176 1370,3235 1353,3252 1353,4668

## Keep-outs
Keep-Out Layer:
  lines w7.87: 1402,1149 6837,1149 ccw(c6837,1194) 6882,1194 6882,5049 ; 1407.5,5086.01 ccw(c1407.5,5041.51) 1363,5041.51 1363,1194 ccw(c1408,1194) 1408,1149 ; 1407.5,5086.77 6837,5086.77 ; 6837,5087 cw(c6837,5042) 6882,5042

## Silkscreen, mask and mechanical layers (free items; w line width, h text height)
Top Overlay:
  circle w10: c2068,2005 r60
  circle w10: c5539,1682 r60
  circle w10: c2073,4540 r60
  circle w10: c6426,4550 r60
  lines w7.87: 2069,2007 ccw(c2069,2008) 2070,2008
  text "BAF_II" at 3610,4698 h31.5
  text "BAF_O" at 4722,4698 h31.5
  text "24V0" at 4569,4695 h31.5
  text "24V0" at 3790,4692 h31.5
  text "+24V" at 3935,4692 h31.5
  text "BAFO_I" at 4073,4691 h31.5
  text "24V0" at 4266,4691 h31.5
  text "+24V" at 4409,4691 h31.5
  text "M1" at 6039,4689 h31.5
  text "24V0" at 5856,4688 h31.5
  text "SIN" at 5066,4686 h31.5
  text "KIN" at 5708,4686 h31.5
  text "24V0" at 5534,4685 h31.5
  text "24V0" at 5210,4682 h31.5
  text "+24V" at 5373,4682 h31.5
  text "24V0" at 6390,4246 h31.5
  text "VACU" at 6389,4100 h31.5
  text "24V0" at 6389,3936 h31.5
  text "AIR_B" at 6378,3795 h31.5
  text "24V0" at 6400,3622 h31.5
  text "AIR_C" at 6378,3436 h31.5
  text "GND" at 4464,3311 h31.5
  text "UPP_R" at 6381,3299 h31.5
  text "SCLK" at 4434,3219 h31.5
  text "SWIO" at 4434,3174 h31.5
  text "+3V3" at 4432,3128 h31.5
  text "24V0" at 6405,3119 h31.5
  text "+24V" at 6397,2998 h31.5
  text "24V" at 1734,2836 h31.5
  text "FIT_R" at 6378,2796 h31.5
  text "IN" at 1746,2784 h31.5
  text "24V0" at 6398,2691 h31.5
  text "24V0" at 1750,2618 h31.5 r45
  text "+24V" at 6401,2522 h31.5
  text "24V" at 1733,2517 h31.5
  text "IN" at 1748,2465 h31.5
  text "24V0" at 1744,2327 h31.5 r45
  text "+24V" at 1788,1554 h31.5
  text "24V0" at 1939,1554 h31.5
  text "SPEED" at 2090,1552 h31.5
  text "24V0" at 2570,1552 h31.5
  text "R_LG" at 2745,1552 h31.5
  text "G_LG" at 3390,1552 h31.5
  text "24V0" at 6390,1552 h31.5
  text "DIR" at 2281,1551 h31.5
  text "24V0" at 2896,1551 h31.5
  text "STOP_K" at 3041,1551 h31.5
  text "START_K" at 3674,1551 h31.5
  text "24V0" at 3907,1551 h31.5
  text "ERR" at 2425,1550 h31.5
  text "24V0" at 3246,1550 h31.5
  text "24V0" at 3527,1550 h31.5
  text "P_RST" at 6075,1550 h31.5
  text "24V0" at 6243,1550 h31.5
  text "24V0" at 4206,1549 h31.5
  text "P_ST" at 5944,1549 h31.5
  text "+24V" at 4076,1548 h31.5
  text "P_END" at 5118,1547 h31.5
  text "P_ERR" at 4953,1546 h31.5
  text "P_INL" at 5289,1546 h31.5
  text "P_TAG" at 5772,1545 h31.5
  text "24V0" at 4623,1544 h31.5
  text "P_COL" at 5450,1544 h31.5
  text "P_LES" at 5609,1544 h31.5
  text "FLUID" at 4771,1543 h31.5
  text "SCAN" at 4339,1540 h31.5
  text "+24V" at 4486,1539 h31.5
Bottom Overlay:
  text "WL1800-E-D001-PrinterC Rev.2.0" at 4997,3050 h31.5
  text "2017-4-10(LJW)" at 4996,2989 h31.5

## Text inside footprints (layer, text, board x,y; h text height)
C5: Bottom Overlay "+" at 2644.01,2683 h31.5 r180
C7: Bottom Overlay "+" at 2714,3179.99 h31.5 r90
C8: Top Overlay "+" at 3633.99,3545 h31.5 r180
C22: Top Overlay "+" at 3071,4025.99 h31.5 r270
Q1: Bottom Overlay "S" at 5946,4041.47 h31.5; Bottom Overlay "D" at 6036,4041.47 h31.5; Bottom Overlay "G" at 6126,4041.47 h31.5
Q2: Bottom Overlay "S" at 5428,4041.47 h31.5; Bottom Overlay "D" at 5518,4041.47 h31.5; Bottom Overlay "G" at 5608,4041.47 h31.5